# Allegro board LAY-96098_A.brd
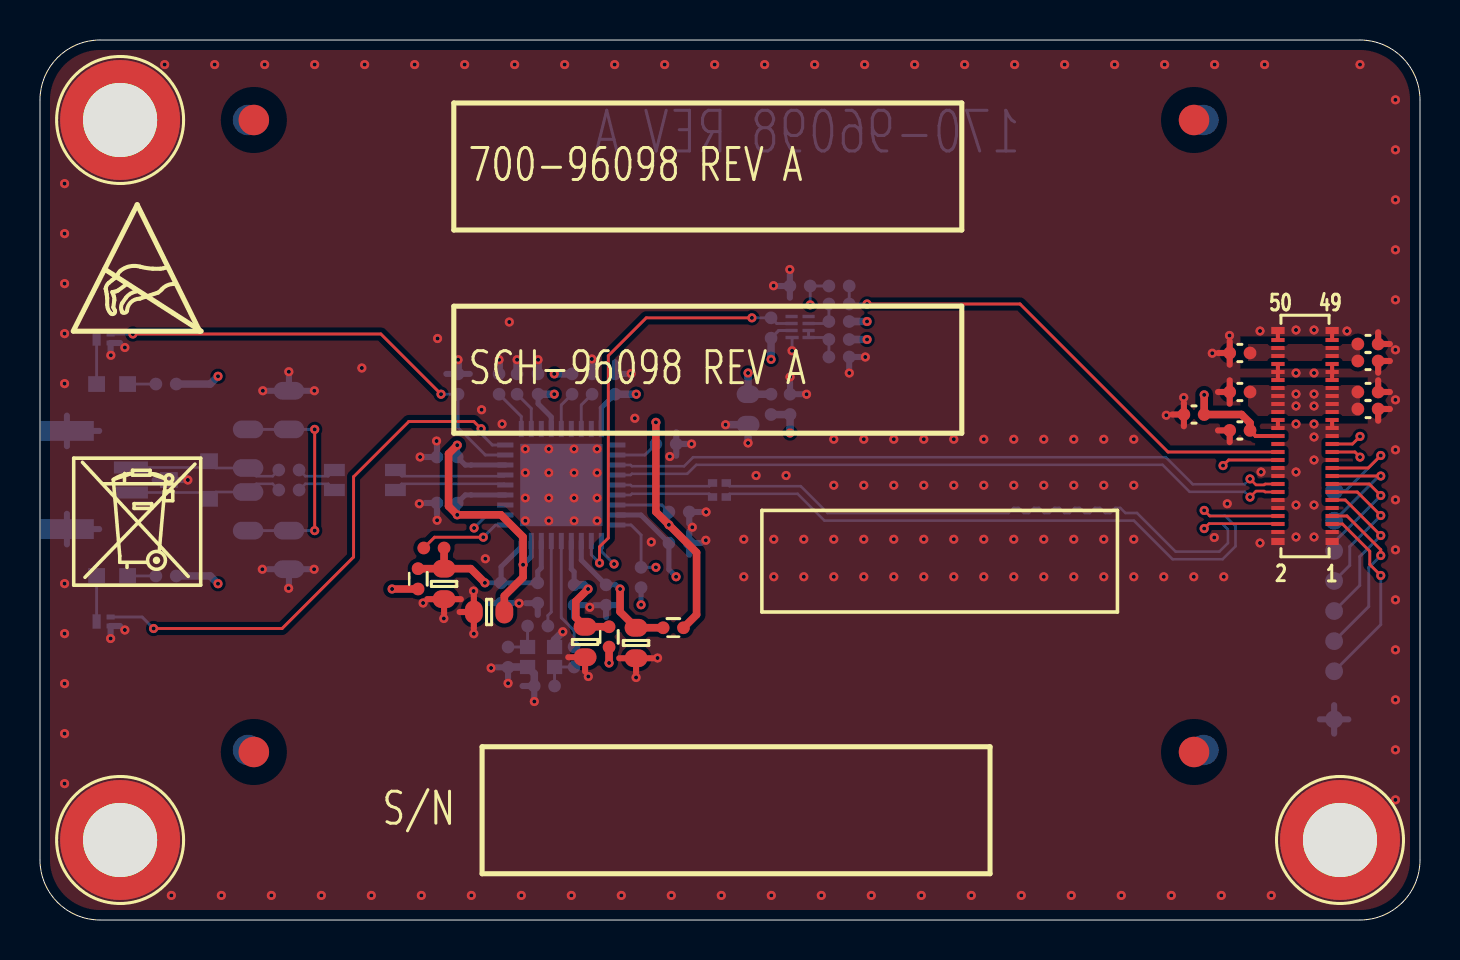
[diagram p0: board, top side]
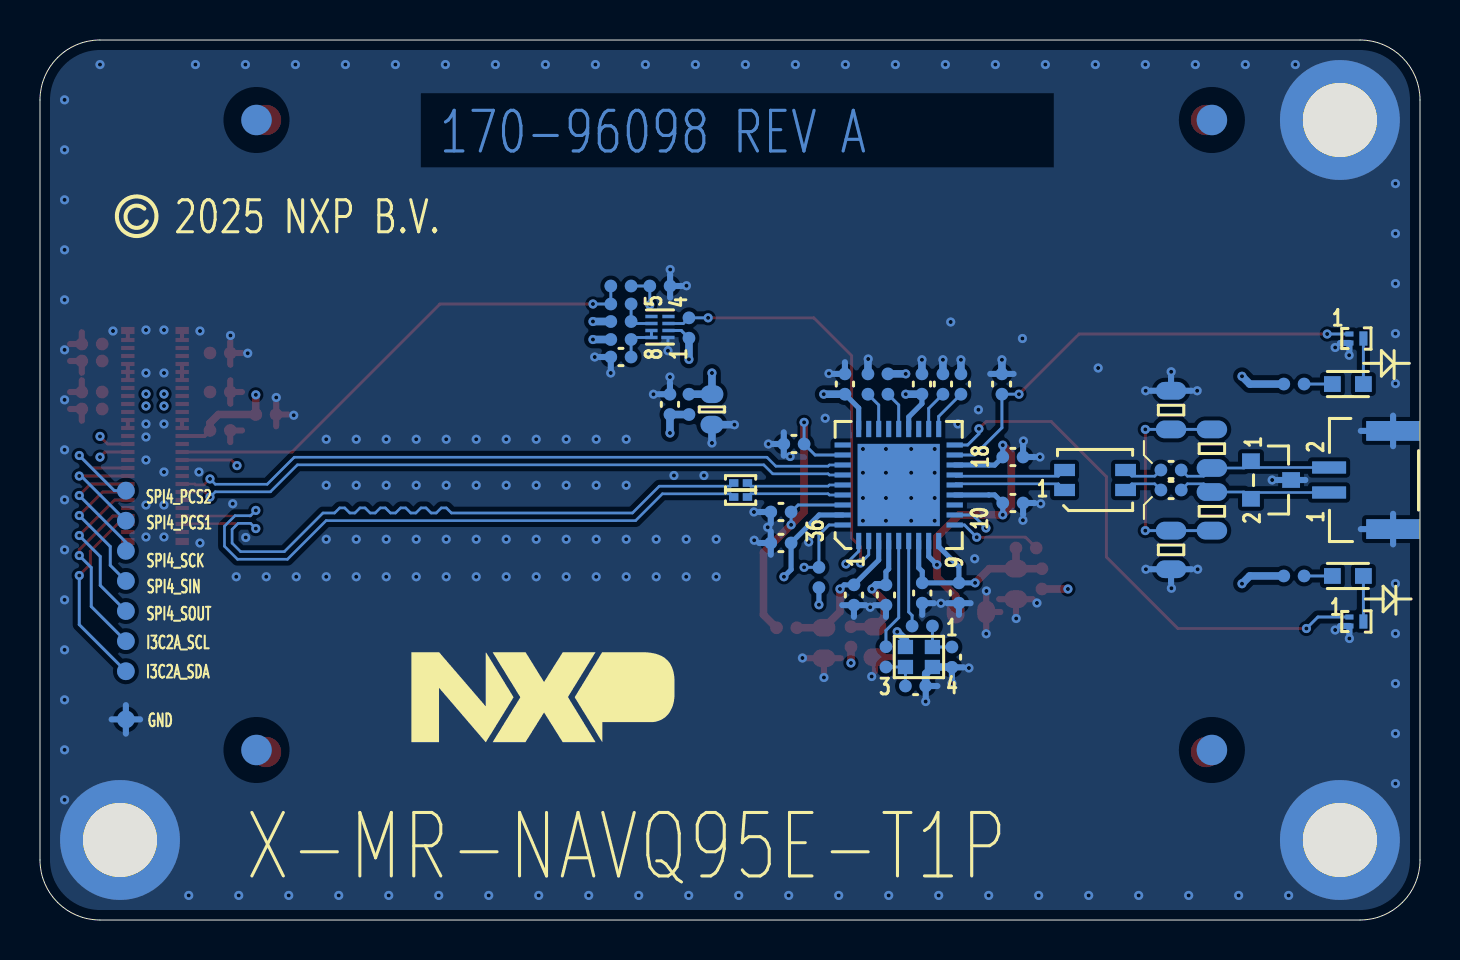
[diagram p1: board, bottom side, seen from below]

Outline 69.01 x 44 mm; copper layers: TOP, L2_GND1, L3_SIG1, L4_SIG2, L5_GND2, BOTTOM. Coordinates in mm from the lower left corner of the outline.
Outline path: 0,41 arc(0.88,43.12) 3,44 66.01,44 arc(68.13,43.12) 69.01,41 69.01,3 arc(68.13,0.88) 66.01,0 3,0 arc(0.88,0.88) 0,3 0,41

## Design rules (mm)
constraint set DEFAULT: min track width 0.145
net group DP1: nets TRX_M TRX_P
net group DP2: nets N13161 N13259
net group DP3: nets N13153 N13235
net group DP4: nets N44594 N44600
net group ETH_RX0: nets ETH_RX0_N ETH_RX0_P
net group ETH_TX4: nets ETH_TX0_N ETH_TX0_P

## Placement (name value [footprint] x y rotation side)
BH1  MH3.7_6  [MH236-146P]  4.01 40 0 top
BH2  MH3.7_6  [MH236-146P]  4.01 4 0 top
BH3  MH3.7_6  [MH236-146P]  65.01 4 0 top
C6  0.1uF  [CC0402_25]  39.96 28.15 0 bottom
C488  0.1uF  [CC0402_25]  24.89 16.35 270 bottom
C493  1uF  [CC0603_OV]  20.21 16.8 270 top
C499  0.1uF  [CC0201]  33.97 21.15 180 bottom
C500  0.1uF  [CC0201]  33.97 21.85 180 bottom
C501  0.1uF  [CC0402_25]  23.06 16.35 270 bottom
C502  0.1uF  [CC0402_25]  28.31 16.25 270 bottom
C503  10uF  [CC0603_OV]  29.81 13.85 270 top
C504  0.1uF  [CC0402_25]  26.71 16.25 270 bottom
C505  1uF  [CC0603_OV]  27.26 13.9 270 top
C506  0.1uF  [CC0402_25]  37.51 25.78 90 bottom
C507  0.1uF  [CC0402_25]  28.76 26.8 90 bottom
C508  1uF  [CC0603_OV]  35.41 25.53 270 bottom
C509  0.1uF  [CC0402_25]  24.91 26.8 90 bottom
C510  0.1uF  [CC0402_25]  31.96 18.85 0 bottom
C511  1uF  [CC0603_OV]  22.46 15.4 180 top
C512  0.1uF  [CC0402_25]  20.36 20.85 180 bottom
C513  0.1uF  [CC0402_25]  20.36 23.15 180 bottom
C514  0.1uF  [CC0402_25]  31.96 20.4 0 bottom
C515  0.1uF  [CC0402_25]  31.31 23.8 0 bottom
C516  10pF  [CC0402_25]  25.22 11.7 180 bottom
C517  10pF  [CC0402_25]  23.41 13.14 270 bottom
C518  0.1uF  [CC0402_25]  12.45 21.5 180 bottom
C519  0.1uF  [CC0402_25]  12.45 22.5 180 bottom
C520  4700pF  [CC0805_OV]  12.45 18.5 270 bottom
C521  1uF  [CC0402_25]  66.41 28.8 0 top
C522  1uF  [CC0402_25]  66.41 25.55 0 top
C523  0.1uF  [CC0402_25]  66.41 26.4 0 top
C524  0.1uF  [CC0402_25]  66.41 27.95 0 top
C525  0.1uF  [CC0402_25]  60 28.35 180 top
C526  0.1uF  [CC0402_25]  60 26.4 180 top
C527  1uF  [CC0402_25]  57.71 25.27 180 top
C528  0.1uF  [CC0402_25]  60 24.48 180 top
D33  LED_AMB  [LED_0603]  3.61 26.8 180 bottom
D34  LED_GRN  [LED_0603]  3.61 17.2 180 bottom
J27  SM02B-GHS-TB(LF)(SN)  [CON_1X2_1P25_5P8X4P1_SM_RA]  2.3 22 90 bottom
J33  CON PLUG 2X25  [CON50_0P4_11P72X2P05_SM_A]  63.26 24.2 90 top
L1  600OHM  [IND_0402]  18.91 17.06 270 top
L2  600OHM  [IND_0402]  28.46 14.15 270 top
L3  600OHM  [IND_0402]  36.56 25.78 90 bottom
L4  600OHM  [IND_0402]  31.67 14.61 0 top
L55  DLW32MH101XT2  [IND_3P4X2P7_SMT]  16.25 22 180 bottom
NOREF  -  [unnamed]  57.71 40 0 top
NOREF#2  -  [#2]  21.91 14 0 top
NOREF#3  -  [#2]  2.66 28.75 0 top
NOREF#4  -  [#2]  1.35 19.55 90 top
NOREF#5  -  [#2]  21.91 14 90 top
NOREF#6  -  [#2]  20.69 24.34 0 top
NOREF#7  -  [#2]  2.66 14.6 0 top
NOREF#8  -  [#2]  3.53 14.7 90 top
NOREF#9  -  [#2]  36.1 15.4 0 top
NOREF#10  -  [#2]  1.68 29.44 0 top
NOREF#11  -  [#2]  2.83 29.07 0 top
NOREF#12  -  [#2]  37.51 30.32 0 top
NOREF#13  -  [#2]  67.87 4.9 0 top
NOREF#14  -  [#2]  37.58 30.18 0 top
NOREF#15  -  [#2]  22.11 2.31 0 top
NOREF#16  -  [#2]  38.43 29.82 90 top
NOREF#17  -  [#2]  2.83 14.93 0 top
NOREF#18  -  [#2]  -441.94 233.39 0 top
NOREF#19  -  [#2]  38.51 28.98 90 top
NOREF#20  -  [#2]  25.73 12.65 90 top
NOREF#21  -  [#2]  6.02 0 90 top
NOREF#22  -  [unnamed]  10.69 8.4 0 top
NOREF#23  -  [#2]  3.53 28.85 90 top
NOREF#24  -  [#2]  0.25 24.9 0 top
NOREF#25  -  [#2]  62.23 30.06 0 top
NOREF#26  -  [#2]  61.9 19.4 90 top
NOREF#27  -  [#2]  -45.58 -91.35 0 top
NOREF#28  -  [#2]  14.72 21.5 90 top
NOREF#29  -  [#2]  14.72 21.5 0 top
NOREF#30  -  [#2]  64.28 18.34 90 top
NOREF#31  -  [unnamed]  57.71 8.4 0 top
NOREF#32  -  [#2]  0.25 24.9 0 top
NOREF#33  -  [#2]  17.45 20.45 0 top
NOREF#34  -  [#2]  20.69 34.5 0 top
NOREF#35  -  [#2]  -467.22 -286.29 0 top
NOREF#36  -  [#2]  1.68 16.74 0 top
NOREF#37  -  [unnamed]  10.69 40 0 top
NOREF#38  -  [#2]  53.88 15.4 0 top
NOREF#39  -  [#2]  6.87 40.9 0 top
NOREF#40  -  [#2]  0 39.6 0 top
NOREF#41  -  [#2]  3.71 28.75 90 top
NOREF#42  -  [#2]  3.71 14.6 90 top
NOREF#43  -  [#2]  61.9 29.48 0 top
NOREF#44  -  [#2]  19.7 23.85 0 top
NOREF#45  -  [#2]  4.01 4 0 top
NOREF#46  -  [#2]  37.61 29.12 0 top
NOREF#47  -  [#2]  6.87 4.9 0 top
NOREF#48  -  [#2]  24.38 13.65 0 top
NOREF#49  -  [unnamed]  10.41 40 180 bottom
NOREF#50  -  [unnamed]  58.18 8.5 180 bottom
NOREF#51  -  [unnamed]  58.18 40 180 bottom
NOREF#52  -  [unnamed]  10.41 8.5 180 bottom
NOREF#53  -  [#2]  64.17 35.16 180 bottom
NOREF#54  -  [#2]  50.42 8.89 180 bottom
Q4  NX5008NBKMYL  [DFN10106B]  3.18 14.93 180 bottom
Q6  NX5008NBKMYL  [DFN10106B]  3.18 29.07 180 bottom
R5  200K  [RC0402_25]  39.96 29.02 180 bottom
R41  10K  [RC0402_25]  38.01 31.7 180 bottom
R42  0 OHM  [RC0402_25]  39.96 30.8 180 bottom
R223  10K  [RC0402_25]  30.06 17.12 90 bottom
R224  10K  [RC0402_25]  19.7 18.6 180 top
R231  680  [RC0402_25]  6.3 26.8 180 bottom
R232  680  [RC0402_25]  6.3 17.2 180 bottom
R233  15  [RC0402_25]  26.71 13.16 270 bottom
R234  15  [RC0402_25]  24.89 14.7 180 bottom
R235  0 OHM  [RC0402_25]  39.96 31.7 180 bottom
R236  10K  [RC0402_25]  36.56 29.6 90 bottom
R237  10K  [RC0402_25]  20.91 26.8 90 bottom
R239  10K  [RC0402_25]  23.86 26.8 90 bottom
R240  10K  [RC0402_25]  22.96 26.8 90 bottom
R559  1.0K  [RC0805_OV]  10.41 20.43 270 bottom
R560  1.0K  [RC0805_OV]  10.41 23.57 90 bottom
R561  100 K  [RC0805_OV]  12.45 25.5 90 bottom
R562  10K  [RC0402_25]  27.61 26.8 90 bottom
R563  10K  [RC0402_25]  26.61 26.8 270 bottom
R564  10K  [RC0402_25]  39.96 29.93 180 bottom
TP1  TP_35MIL  [TESTPOINT_35MIL]  64.71 12.44 270 bottom
TP2  TP_35MIL  [TESTPOINT_35MIL]  64.71 13.94 270 bottom
TP3  TP_35MIL  [TESTPOINT_35MIL]  64.71 15.45 270 bottom
TP4  TP_35MIL  [TESTPOINT_35MIL]  64.71 16.95 270 bottom
TP5  TP_35MIL  [TESTPOINT_35MIL]  64.71 18.46 270 bottom
TP6  TP_35MIL  [TESTPOINT_35MIL]  64.71 19.96 270 bottom
TP7  TP_35MIL  [TESTPOINT_35MIL]  64.71 21.47 270 bottom
TP8  TP_35MIL  [TESTPOINT_35MIL]  64.71 10.03 0 bottom
U1  TJA1103BHN  [QFN36_0P5_6X6]  26.07 21.75 90 bottom
U64  PESD2ETH1G-T  [SOT23_A]  7.45 22 270 bottom
U65  PCA9306JK  [X2SON8_0P35_1X1P35MM]  38.01 29.65 0 bottom
Y1  25MHz  [XTL4_2P1X1P7MM_SM]  25.06 13.15 0 bottom

## Library data of the parts
BH1-BH3 = MOUNT_HOLE
C6 C493 C503 C505 C508 C511 C516-C522 C527 = CAP_NP
C488 C501 C502 C504 C506 C507 C509 C510 C512-C515 C523-C526 C528 = CAP_NP: tolerance: 10%
C499 C500 = CAP_NP: Tolerance: TOLERANCE; User Part Number: 150-80124
D33 D34 = LED
J27 = CONN_2X1_SH
J33 = HDR_2X25_4S
L1-L4 = INDUCTOR
L55 = DLW43
Q4 Q6 = NMOS_2N7002BKW_3P
R5 R41 R42 R223 R224 R231-R237 R239 R240 R562-R564 = RES
R559-R561 = RES: tolerance: 1%
TP1-TP8 = T POINT R: Tolerance: TOLERANCE; User Part Number: 510-75618
U1 = TJA1103BHN_HVQFN36P
U64 = ESD_DIODE_2LINE
U65 = PCA9306_TSSOP8
Y1 = XTAL_13

## Footprints (pads in the part's own frame, mm; a bottom-side part is the same pattern mirrored in y, then rotated)
CC0201
  rect 0.47x0.381 smd: 1(-0.343,0) 2(0.343,0)
CC0402_25
  round 0.635 smd: 1(-0.508,0) 2(0.508,0)
CC0603_OV
  oval 0.889x1.143 smd: 1(-0.762,0) 2(0.762,0)
CC0805_OV
  oval 0.889x1.524 smd: 1(-0.965,0) 2(0.965,0)
CON50_0P4_11P72X2P05_SM_A
  rect 0.203x0.66 smd: 1(-4.8,-1.355) 2(-4.8,1.355) 3(-4.4,-1.355) 4(-4.4,1.355) 5(-4,-1.355) 6(-4,1.355) 7(-3.6,-1.355) 8(-3.6,1.355) 9(-3.2,-1.355) 10(-3.2,1.355) 11(-2.8,-1.355) 12(-2.8,1.355) 13(-2.4,-1.355) 14(-2.4,1.355) 15(-2,-1.355) 16(-2,1.355) 17(-1.6,-1.355) 18(-1.6,1.355) 19(-1.2,-1.355) 20(-1.2,1.355) 21(-0.8,-1.355) 22(-0.8,1.355) 23(-0.4,-1.355) 24(-0.4,1.355) 25(0,-1.355) 26(0,1.355) 27(0.4,-1.355) 28(0.4,1.355) 29(0.8,-1.355) 30(0.8,1.355) 31(1.2,-1.355) 32(1.2,1.355) 33(1.6,-1.355) 34(1.6,1.355) 35(2,-1.355) 36(2,1.355) 37(2.4,-1.355) 38(2.4,1.355) 39(2.8,-1.355) 40(2.8,1.355) 41(3.2,-1.355) 42(3.2,1.355) 43(3.6,-1.355) 44(3.6,1.355) 45(4,-1.355) 46(4,1.355) 47(4.4,-1.355) 48(4.4,1.355) 49(4.8,-1.355) 50(4.8,1.355)
  rect 0.356x0.66 smd: SH1(-5.275,1.355) SH2(-5.275,-1.355) SH3(5.275,-1.355) SH4(5.275,1.355)
CON_1X2_1P25_5P8X4P1_SM_RA
  rect 0.61x1.702 smd: 1(-0.625,2.247) 2(0.625,2.247)
  rect 0.991x2.692 smd: S1(-2.455,-0.953) S2(2.455,-0.953)
DFN10106B
  rect 0.406x0.254 smd: 1(-0.35,0.225) 2(-0.35,-0.225)
  rect 0.406x0.711 smd: 3(0.35,0)
IND_3P4X2P7_SMT
  rect 1.041x0.61 smd: 1(-1.525,-0.5) 2(1.525,-0.5) 3(1.525,0.5) 4(-1.525,0.5)
IND_0402
  round 0.635 smd: 1(-0.508,0) 2(0.508,0)
LED_0603
  rect 0.838x0.787 smd: A(-0.775,0) C(0.775,0)
MH236-146P
  round 5.994 hole 3.708: 1(0,0)
QFN36_0P5_6X6
  rect 0.813x0.254 smd: 1(-2.8,2) 2(-2.8,1.5) 3(-2.8,1) 4(-2.8,0.5) 5(-2.8,0) 6(-2.8,-0.5) 7(-2.8,-1) 8(-2.8,-1.5) 9(-2.8,-2) 19(2.8,-2) 20(2.8,-1.5) 21(2.8,-1) 22(2.8,-0.5) 23(2.8,0) 24(2.8,0.5) 25(2.8,1) 26(2.8,1.5) 27(2.8,2)
  rect 0.254x0.813 smd: 10(-2,-2.8) 11(-1.5,-2.8) 12(-1,-2.8) 13(-0.5,-2.8) 14(0,-2.8) 15(0.5,-2.8) 16(1,-2.8) 17(1.5,-2.8) 18(2,-2.8) 28(2,2.8) 29(1.5,2.8) 30(1,2.8) 31(0.5,2.8) 32(0,2.8) 33(-0.5,2.8) 34(-1,2.8) 35(-1.5,2.8) 36(-2,2.8)
  rect 4.115x4.115 smd: 37(0,0)
RC0402_25
  round 0.635 smd: 1(-0.508,0) 2(0.508,0)
RC0805_OV
  oval 0.889x1.524 smd: 1(-0.965,0) 2(0.965,0)
SOT23_A
  rect 0.787x0.889 smd: 1(-0.94,-1.003) 2(0.94,-1.003) 3(0,1.003)
TESTPOINT_35MIL
  round 0.889 smd: 1(0,0)
unnamed
  round 1.524 smd: (0,0)
X2SON8_0P35_1X1P35MM
  rect 0.66x0.17 smd: 1(-0.4,0.525)
  rect 0.61x0.17 smd: 2(-0.425,0.175) 3(-0.425,-0.175) 4(-0.425,-0.525) 5(0.425,-0.525) 6(0.425,-0.175) 7(0.425,0.175) 8(0.425,0.525)
XTL4_2P1X1P7MM_SM
  rect 0.762x0.711 smd: 1(-0.675,-0.5) 2(0.675,-0.5) 3(0.675,0.5) 4(-0.675,0.5)

## Nets
GND: BH1.1 BH2.1 BH3.1 C6.2 C488.2 C493.2 C501.2 C502.2 C503.2 C504.2 C505.2 C506.2 C507.2 C508.2 C509.2 C510.2 C511.2 C512.2 C513.2 C514.2 C515.2 C516.2 C517.2 C520.2 C521.2 C522.2 C523.2 C524.2 C525.2 C526.2 C527.2 C528.2 J27.S1 J27.S2 J33.1 J33.2 J33.7 J33.8 J33.10 J33.16 J33.18 J33.19 J33.24 J33.25 J33.27 J33.28 J33.29 J33.30 J33.39 J33.40 J33.41 J33.42 J33.43 J33.44 J33.49 J33.50 J33.SH1 J33.SH2 J33.SH3 J33.SH4 Q4.2(SOURCE) Q6.2(SOURCE) R41.2 R237.2 R239.2 R240.2 R561.2 R562.2 TP8.1(TP) U1.37 U64.3(COM_CATHODE) U65.1 Y1.2 Y1.4
VDD_CORE: C502.1 C503.1 L4.1 U1.3
VDD_SYS_1V8: C506.1 C527.1 C528.1 J33.26 L3.1
VDD_SYS_3V3: C522.1 C523.1 C526.1 J33.31 J33.32 J33.33 J33.34 J33.35 J33.36 J33.37 J33.38 L1.2 L2.2 R5.1 R231.1 R232.1 R564.1
VDD_SYS_5V0: C521.1 C524.1 C525.1 J33.45 J33.46 J33.47 J33.48
VDDA_AO: C488.1 C493.1 C501.1 L1.1 R224.1 U1.7 U1.9
VDDIO: C507.1 C508.1 C509.1 C510.1 L3.2 R223.1 R236.1 R563.1 U1.22 U1.27 U1.35 U65.2
ENET_MDC: J33.23 U1.1
ENET_MDIO: J33.21 R223.2 U1.36
ETH_RST: J33.20 R224.2 U1.10
ETH_RX0_N: J33.14 U1.30
ETH_RX0_P: J33.12 U1.31
ETH_TX0_N: C499.1 J33.6
ETH_TX0_P: C500.1 J33.4
ETH_WAKE_INT: J33.22 R42.1 R235.1
GPIO0_CONFIG0_LED: Q6.1 R237.1 U1.17
GPIO1_LED: Q4.1 U1.18
I3C2A_SCL: J33.5 TP2.1(TP)
I3C2A_SDA: J33.3 TP1.1(TP)
SPI4_PCS1: J33.15 TP6.1(TP)
SPI4_PCS2: J33.17 TP7.1(TP)
SPI4_SCK: J33.13 TP5.1(TP)
SPI4_SIN: J33.11 TP4.1(TP)
SPI4_SOUT: J33.9 TP3.1(TP)
TJA_INT_N: R236.2 U1.2(\I\N\T\) U65.3
TJA_WAKE_IN_OUT: R41.1 R235.2 U1.11
TRX_M: L55.4 U1.15
TRX_P: L55.1 U1.14
VREGA_OUT: C511.1 C512.1 C513.1 U1.8 U1.13 U1.16
N03569: C504.1 C505.1 L2.1 U1.4
N06696: C514.1 C515.1 L4.2 U1.29 U1.34
N08528: C516.1 R233.2 Y1.3
N08532: R233.1 U1.5
N08540: R234.1 U1.6
N08546: C517.1 R234.2 Y1.1
N12404: R240.1 U1.19
N12408: R239.1 U1.20
N13153: C518.2 J27.1 R559.1 U64.2
N13161: C518.1 L55.2
N13235: C519.2 J27.2 R560.1 U64.1
N13259: C519.1 L55.3
N13323: C520.1 R559.2 R560.2 R561.1
N16366: R562.1 U1.25
N16892: R563.2 U1.23
N19109: C6.1 R5.2 U65.7(VREF2) U65.8
N22838: R42.2 R564.2 U65.6
N37884: D34.C(CATHODE) Q4.3
N37999: D34.A R232.2
N38628: D33.C(CATHODE) Q6.3
N38904: D33.A R231.2
N44594: C499.2 U1.33
N44600: C500.2 U1.32

Pads without a net: U1 12 21 24 26 28; U65 4 5

## Via types
v1: diameter 0.457, hole 0.203, TOP to BOTTOM, 261 vias
v2: diameter 0.457, hole 0.206, TOP to BOTTOM, 16 vias

## Routing (per net, layer and track width the routed paths; a pad name or vN(x,y) marks a point on that pad's centre or on a via; arc(x,y) is an arc through that point)
GND: length 71.9
  TOP w0.203: J33.49 J33.SH3 ; J33.44 J33.42 J33.40 ; J33.50 J33.SH4 ; J33.29 J33.27 ; J33.43 J33.41 J33.39 ; J33.30 J33.28
  TOP w0.305: 29.81,12.38 C503.2 ; C503.2 30.64,13.09 ; C503.2 28.97,13.09 ; C493.2 21.04,16.04 ; C493.2 19.37,16.04 ; C493.2 20.21,15.33 ; C526.2 59.49,26.98 ; C526.2 59.49,25.82 ; C526.2 58.91,26.4 ; C527.2 57.2,25.86 ; C527.2 57.2,24.69 ; C527.2 56.61,25.27 ; 66.91,26.98 C523.2 67.5,26.4 ; 26.42,13.14 C505.2 27.26,12.43 ; 67.5,27.95 C524.2 66.91,27.37 ; 58.91,24.48 C528.2 59.49,23.89 ; 59.49,27.77 C525.2 ; C525.2 59.49,28.93 ; C525.2 58.91,28.35 ; 20.98,15.4 C511.2 ; C511.2 21.69,16.24 ; C511.2 21.69,14.56 ; 67.5,25.55 C522.2 66.91,24.97 ; 66.91,29.38 C521.2 67.5,28.8
  BOTTOM w0.145: U65.1 v1(37.61,28.46)
  BOTTOM w0.305: 24.71,11.12 C516.2 24.13,11.7 ; 41.05,28.15 C6.2 40.46,27.57 ; 27.72,15.74 C502.2 ; C502.2 28.31,15.16 ; C502.2 28.89,15.74 ; C520.2 13.48,17.54 ; C520.2 12.45,16.83 ; C520.2 11.42,17.54 ; 26.71,15.16 C504.2 27.29,15.74 ; J27.S2 1.35,25.22 ; J27.S2 2.96,24.45 ; J27.S2 1.35,23.69 ; J27.S1 1.35,20.31 ; J27.S1 1.35,18.78 ; J27.S1 2.96,19.55 ; 37.51,26.87 C506.2 38.09,26.29 ; R561.2 12.45,27.17 ; R561.2 13.48,26.46 ; R561.2 11.42,26.46 ; C515.2 32.4,23.8 ; C515.2 31.81,24.38 ; C515.2 31.81,23.22 ; C510.2 33.05,18.85 ; C510.2 32.46,19.43 ; C510.2 32.46,18.27 ; R41.2 37.5,32.28 ; R41.2 36.91,31.7 ; R41.2 37.5,31.12 ; 5.73,22 U64.3 7.16,22 ; C501.2 23.64,15.84 ; C501.2 22.47,15.84 ; C501.2 23.06,15.26 ; 19.26,23.15 C513.2 19.85,23.73 ; 4,28.85 Q6.2 3.53,28.46 ; 33.05,20.4 C514.2 32.46,19.82 ; 20.32,27.31 R237.2 21.49,27.31 ; 3.53,14.31 Q4.2 4,14.7 ; 22.82,12.63 C517.2 23.41,12.05 ; 19.26,20.85 C512.2 19.85,20.27 ; 28.76,27.89 C507.2 29.34,27.31 ; 24.3,15.84 C488.2 24.89,15.26 ; 64,10.03 TP8.1 ; TP8.1 64.71,10.74 ; TP8.1 64.71,9.32 ; TP8.1 65.42,10.03
  BOTTOM w0.381: R237.2 v1(20.91,28.01) ; R239.2 v1(23.86,28.01) ; v1(27.59,28.05) 27.61,28.04 R562.2 ; C516.2 24.71,12.32 Y1.4 23.42,12.65 C517.2 ; C509.2 v1(24.91,28.01) ; v1(34.28,24.76) 34.28,24.77 C508.2 v1(35.41,23.85) ; v1(26.14,14.41) 25.73,14 Y1.2 ; R240.2 v1(22.96,28.01)
  vias: v1(1.23,36.82) v1(1.23,34.32) v1(1.23,31.82) v1(1.23,29.32) v1(1.23,26.82) v1(1.23,16.82) v1(1.23,14.32) v1(1.23,11.82) v1(1.23,9.32) v1(1.23,6.82) v1(3.54,28.24) v1(3.53,14.07) v1(4.24,28.62) v1(4.24,14.5) v1(6.23,42.77) v1(6.57,1.23) v1(7.39,22) v1(8.73,42.77) v1(9.07,1.23) v1(11.14,26.46) v1(11.12,17.54) v1(11.23,42.77) v1(11.57,1.23) v1(12.44,27.41) v1(12.43,16.59) v1(13.73,42.77) v1(13.72,26.46) v1(13.71,17.54) v1(14.07,1.23) v1(16.09,27.6) v1(16.23,42.77) v1(16.57,1.23) v1(18.73,42.77) v1(19.01,23.15) v1(18.97,20.81) v1(19.07,1.23) v1(19.16,15.85) v1(19.83,23.95) v1(19.86,19.99) v1(19.88,29.07) v1(20.19,15.07) v1(21.23,42.77) v1(21.57,1.23) v1(21.68,16.45) v1(21.69,14.31) v1(22.08,25.51) v1(22.27,18.06) v1(22.56,12.6) v1(23.11,24.8) v1(23.41,11.84) v1(23.47,29.9) v1(23.73,42.77) v1(23.96,15.84) v1(24.07,1.23) v1(24.72,10.93) v1(26.23,42.77) v1(26.57,1.23) v1(27.42,12.18) v1(27.49,15.64) v1(28.73,42.77) v1(29.07,1.23) v1(29.56,27.32) v1(29.74,25.09) v1(29.81,12.12) v1(30.57,18.9) v1(30.88,13.1) v1(31.23,42.77) v1(31.49,23.18) v1(31.57,1.23) v1(32.58,23.8) v1(32.62,19.64) v1(33.31,20.4) v1(33.29,18.99) v1(33.73,42.77) v1(34.07,1.23) v1(35.19,19.04) v1(35.19,17.16) v1(35.81,22.23) v1(36.23,42.77) v1(36.57,1.23) v1(36.68,31.71) v1(36.69,19.04) v1(36.69,17.16) v1(37.31,22.23) v1(37.49,32.52) v1(37.51,27.15) v1(38.19,19.04) v1(38.19,17.16) v1(38.33,26.29) v1(38.73,42.77) v1(39.07,1.23) v1(39.69,24.04) v1(39.69,21.74) v1(39.69,19.04) v1(39.69,17.16) v1(40.47,27.35) v1(41.23,42.77) v1(41.19,24.04) v1(41.19,21.74) v1(41.19,19.04) v1(41.19,17.16) v1(41.27,28.15) v1(41.57,1.23) v1(42.69,24.04) v1(42.69,21.74) v1(42.69,19.04) v1(42.69,17.16) v1(43.73,42.77) v1(44.07,1.23) v1(44.19,24.04) v1(44.19,21.74) v1(44.19,19.04) v1(44.19,17.16) v1(45.69,24.04) v1(45.69,21.74) v1(45.69,19.04) v1(45.69,17.16) v1(46.23,42.77) v1(46.57,1.23) v1(47.19,24.04) v1(47.19,21.74) v1(47.19,19.04) v1(47.19,17.16) v1(48.73,42.77) v1(48.69,24.04) v1(48.69,21.74) v1(48.69,19.04) v1(48.69,17.16) v1(49.07,1.23) v1(50.19,24.04) v1(50.19,21.74) v1(50.19,19.04) v1(50.19,17.16) v1(51.23,42.77) v1(51.57,1.23) v1(51.69,24.04) v1(51.69,21.74) v1(51.69,19.04) v1(51.69,17.16) v1(53.19,24.04) v1(53.19,21.74) v1(53.19,19.04) v1(53.19,17.16) v1(53.73,42.77) v1(54.07,1.23) v1(54.69,24.04) v1(54.69,21.74) v1(54.69,19.04) v1(54.69,17.16) v1(56.23,42.77) v1(56.19,17.16) v1(56.32,25.24) v1(56.57,1.23) v1(57.19,26.12) v1(57.69,17.16) v1(58.62,28.34) v1(58.73,42.77) v1(58.72,19.12) v1(59.07,1.23) v1(59.19,17.16) v1(59.37,20.81) v1(59.48,29.23) v1(61.01,29.45) v1(61.06,22.4) v1(61.01,18.85) v1(61.23,42.77) v1(61.57,1.23) v1(62.81,29.5) v1(62.81,27.35) v1(62.81,24.8) v1(62.81,22.4) v1(62.81,20.75) v1(62.81,19.15) v1(63.71,29.5) v1(63.71,27.35) v1(63.71,24.8) v1(63.71,24.15) v1(63.71,23) v1(63.71,20.75) v1(63.71,19.15) v1(65.36,29.45) v1(66.01,42.77) v1(67.78,41.01) v1(67.78,38.51) v1(67.78,36.01) v1(67.78,33.51) v1(67.78,31.01) v1(67.78,28.51) v1(67.78,26.01) v1(67.78,23.51) v1(67.78,21.01) v1(67.78,18.51) v1(67.78,16.01) v1(67.78,13.51) v1(67.78,11.01) v1(67.78,8.51) v1(67.78,6.01) v2(24.27,23.55) v2(24.27,22.36) v2(24.27,21.1) v2(24.27,19.96) v2(25.44,23.55) v2(25.44,22.36) v2(25.44,21.1) v2(25.44,19.96) v2(26.71,23.55) v2(26.71,22.36) v2(26.71,21.1) v2(26.71,19.96) v2(27.86,23.55) v2(27.86,22.36) v2(27.86,21.1) v2(27.86,19.96)
VDD_CORE: length 7.1
  TOP w0.381: v1(29.01,16.55) 29.01,15.41 C503.1 L4.1
  BOTTOM w0.254: v1(29.01,16.55) 28.8,16.76 C502.1 27.07,18 U1.3
VDD_SYS_1V8: length 7.2
  TOP w0.203: C528.1 60.79,24.2 J33.26
  TOP w0.381: C528.1 60.51,24.85 60.08,25.27 C527.1 v1(58.21,26.26)
  BOTTOM w0.381: v1(37.51,24.35) C506.1 L3.1
VDD_SYS_3V3: length 8.4
  TOP w0.381: L2.2 v1(28.46,12.85) ; L1.2 v1(17.61,16.55)
  BOTTOM w0.381: R231.1 8.51,26.8 v1(8.9,27.19) ; R232.1 8.51,17.2 v1(8.9,16.81) ; R564.1 v1(41.36,29.93) ; R5.1 v1(41.36,29.02)
  vias: v1(62.81,26.3) v1(62.81,25.7) v1(63.71,26.3) v1(63.71,25.7)
VDDA_AO: length 12
  TOP w0.381: R224.1 C493.1 ; C493.1 L1.1 ; C493.1 21.54,17.57 v1(22.25,16.86)
  BOTTOM w0.254: v1(22.25,16.86) C501.1 ; C501.1 C488.1 24.89,17.43 25.07,17.61 U1.7 ; C501.1 23.06,17.66 24.07,18.67 U1.9
VDDIO: length 17.1
  BOTTOM w0.152: R236.1 36.94,29.48 37.58,29.48
  BOTTOM w0.254: C507.1 28.07,25.6 U1.27 ; C509.1 24.91,25.81 25.57,25.15 U1.22 ; R223.1 v1(30.06,15.76) ; v1(31.81,17.16) 31.45,17.52 C510.1 30.05,20.25 U1.35
  BOTTOM w0.381: C509.1 v1(25.72,26.29) ; L3.2 C508.1 v1(35.41,27.35) ; R563.1 v1(25.72,27.31) ; C507.1 v1(29.82,26.29) ; R236.1 v1(36.56,28.03)
ENET_MDC: length 44.7
  TOP w0.145: v1(66.01,24.18) 65.63,23.8 J33.23
  L4_SIG2 w0.135: v1(66.01,24.18) 65.65,24.18 63.26,21.79 63.26,18.75 62.74,18.24 29.14,18.24 v1(28.71,17.8)
  BOTTOM w0.145: U1.1 28.07,18.44 v1(28.71,17.8)
ENET_MDIO: length 47.1
  TOP w0.145: J33.21 65.75,23.4 v1(66.01,23.15)
  L4_SIG2 w0.135: v1(66.01,23.15) 66.01,18.27 63.99,16.26 31.54,16.26 30.8,17.01 v1(30.8,17.63)
  BOTTOM w0.145: U1.36 29.56,19.75 30.06,19.25 R223.2 v1(30.8,17.63)
ETH_RST: length 45.9
  TOP w0.145: v1(59.16,22.72) 59.44,23 J33.20 ; v1(22.17,19.14) 19.73,19.14 R224.2
  L4_SIG2 w0.135: v1(59.16,22.72) 31.93,22.72 28.34,19.14 v1(22.17,19.14)
  BOTTOM w0.145: v1(22.17,19.14) 22.78,19.75 U1.10
ETH_RX0_N: length 34.1
  TOP w0.13: v1(60.51,22.05) 60.8,21.76 61.21,21.76 61.26,21.8 J33.14
  BOTTOM w0.13: U1.30 29.54,22.75 29.6,22.69 32.21,22.69 32.66,23.14 56.29,23.14 57.64,21.79 60.24,21.79 v1(60.51,22.05)
ETH_RX0_P: length 34.1
  TOP w0.13: v1(60.51,21.15) 60.8,21.44 61.22,21.44 61.26,21.4 J33.12
  BOTTOM w0.13: v1(60.51,21.15) 60.24,21.41 57.48,21.41 56.14,22.76 32.81,22.76 32.37,22.31 29.6,22.31 29.54,22.25 U1.31
ETH_TX0_N: length 33.9
  TOP w0.13: v1(58.21,20.48) 58.49,20.2 J33.6
  BOTTOM w0.13: C499.1 34.48,21.31 37.88,21.31 39.22,19.97 54.7,19.97 56.63,18.04 59.13,18.04 59.78,18.69 59.78,19.69 59.25,20.22 58.48,20.22 v1(58.21,20.48)
ETH_TX0_P: length 33.9
  TOP w0.13: v1(58.21,19.57) 58.46,19.82 61.88,19.82 J33.4
  BOTTOM w0.13: v1(58.21,19.57) 58.48,19.84 59.1,19.84 59.4,19.53 59.4,18.84 58.97,18.42 56.79,18.42 54.86,20.35 54.27,20.35 54.02,20.6 53.77,20.6 53.51,20.35 53.26,20.35 53,20.6 52.75,20.6 52.5,20.35 52.24,20.35 51.99,20.6 51.73,20.6 51.48,20.35 51.23,20.35 50.97,20.6 50.72,20.6 50.46,20.35 50.21,20.35 49.96,20.6 49.7,20.6 49.45,20.35 49.19,20.35 48.94,20.6 48.69,20.6 48.43,20.35 39.38,20.35 38.04,21.69 34.48,21.69 C500.1
ETH_WAKE_INT: length 25.4
  TOP w0.145: v1(41.36,30.8) 49.01,30.8 56.41,23.4 J33.22
  BOTTOM w0.145: R235.1 R42.1 v1(41.36,30.8)
GPIO0_CONFIG0_LED: length 23.2
  TOP w0.145: v1(20.05,26.29) 17.04,29.3 v1(4.64,29.3)
  BOTTOM w0.145: U1.17 22.27,23.25 20.91,24.61 R237.1 v1(20.05,26.29) ; Q6.1 v1(4.64,29.3)
GPIO1_LED: length 27.2
  TOP w0.145: v1(22.06,24.56) 21.69,24.93 18.44,24.93 15.68,22.16 15.68,18.15 12.11,14.57 v1(5.68,14.57)
  BOTTOM w0.145: v1(22.06,24.56) 22.06,24.31 22.62,23.75 U1.18 ; v1(5.68,14.57) 5.11,15.15 Q4.1
I3C2A_SCL: length 8.7
  TOP w0.145: J33.5 65.36,20.2 67.04,18.51 v1(67.04,18.23)
  BOTTOM w0.145: TP2.1 66.44,15.67 66.44,17.62 v1(67.04,18.23)
I3C2A_SDA: length 9.6
  TOP w0.145: v1(67.04,17.23) 66.49,17.77 66.49,18.44 65.13,19.8 J33.3
  BOTTOM w0.145: v1(67.04,17.23) 67.04,14.77 TP1.1
SPI4_PCS1: length 5.7
  TOP w0.145: v1(67.04,22.2) J33.15
  BOTTOM w0.145: v1(67.04,22.2) 66.95,22.2 TP6.1
SPI4_PCS2: length 5.8
  TOP w0.145: J33.17 66.42,22.6 v1(67.04,23.23)
  BOTTOM w0.145: v1(67.04,23.23) 65.29,21.47 TP7.1
SPI4_SCK: length 6.4
  TOP w0.145: v1(67.04,21.23) 66.47,21.8 J33.13
  BOTTOM w0.145: v1(67.04,21.23) 64.71,18.89 TP5.1
SPI4_SIN: length 7.2
  TOP w0.145: v1(67.04,20.23) 65.87,21.4 J33.11
  BOTTOM w0.145: TP4.1 65.49,17.73 65.49,18.68 v1(67.04,20.23)
SPI4_SOUT: length 7.9
  TOP w0.145: J33.9 65.27,21 v1(67.04,19.23)
  BOTTOM w0.145: TP3.1 65.99,16.73 65.99,18.18 v1(67.04,19.23)
TJA_INT_N: length 21.9
  TOP w0.145: v1(35.6,30.11) 30.31,30.11 28.42,28.21 28.42,19.1 27.98,18.66 v1(27.98,17.85)
  BOTTOM w0.145: v1(27.98,17.85) 27.57,18.26 U1.2 ; v1(35.6,30.11) R236.2 36.84,29.82 U65.3
TJA_WAKE_IN_OUT: length 26.6
  L4_SIG2 w0.135: v1(38.51,30.76) 31.5,30.76 25.09,24.35 23.96,24.35 21.71,22.1 v1(21.71,19.6)
  BOTTOM w0.145: v1(38.51,30.76) R41.1 R235.2 ; U1.11 22.36,20.25 v1(21.71,19.6)
TRX_M: length 5.6
  BOTTOM w0.13: L55.4 18.08,22.19 23.21,22.19 U1.15
TRX_P: length 5.6
  BOTTOM w0.13: L55.1 18.08,21.81 23.21,21.81 U1.14
VREGA_OUT: length 19.4
  TOP w0.381: C511.1 23.22,16.2 24.16,17.14 v1(24.16,17.76) 24.16,19.15 23.05,20.26 v1(20.86,20.26) 20.43,20.69 20.43,23.31 v1(20.86,23.74)
  BOTTOM w0.254: U1.8 24.57,18.17 v1(24.16,17.76) ; U1.16 21.56,22.75 21.56,22.75 21.27,22.75 C513.1 v1(20.86,23.74) ; U1.13 21.56,21.25 21.56,21.25 21.27,21.25 C512.1 v1(20.86,20.26)
N03569: length 6.6
  TOP w0.381: L2.1 C505.1 26.79,15.12 26.79,15.94 v1(27.41,16.55)
  BOTTOM w0.254: C504.1 26.71,17.41 26.57,17.55 U1.4
  BOTTOM w0.381: v1(27.41,16.55) 27.2,16.76 C504.1
N06696: length 18
  TOP w0.381: L4.2 32.83,15.27 32.83,18.38 v1(31.45,19.76) 30.8,20.41 v1(30.8,24.88)
  BOTTOM w0.145: U1.34 31.1,20.75 C514.1 v1(31.45,19.76) ; U1.29 30.25,23.25 C515.1 v1(30.8,24.88)
N08528: length 1.9
  BOTTOM w0.145: C516.1 Y1.3 R233.2
N08532: length 5.5
  BOTTOM w0.145: R233.1 26.71,14.47 26.07,15.11 U1.5
N08540: length 4.3
  BOTTOM w0.145: R234.1 25.4,15.23 25.57,15.4 U1.6
N08546: length 2
  BOTTOM w0.145: C517.1 Y1.1 R234.2
N12404: length 2.2
  BOTTOM w0.145: R240.1 24.07,25.18 U1.19
N12408: length 2
  BOTTOM w0.145: R239.1 24.57,25.58 U1.20
N13153: length 8
  BOTTOM w0.13: C518.2 11.63,21.81 10.82,21.81 R559.1 8.79,21.4 U64.2 8.14,21.38 J27.1
N13161: length 2
  BOTTOM w0.13: L55.2 14.41,21.81 13.27,21.81 C518.1
N13235: length 8
  BOTTOM w0.13: J27.2 8.14,22.62 U64.1 8.79,22.6 R560.1 10.82,22.19 11.63,22.19 C519.2
N13259: length 2
  BOTTOM w0.13: L55.3 14.41,22.19 13.27,22.19 C519.1
N13323: length 11.7
  TOP w0.145: v1(13.74,24.53) v1(13.74,19.47)
  BOTTOM w0.145: v1(13.74,24.53) R561.1 R560.2 ; R559.2 C520.1 v1(13.74,19.47)
N16366: length 2
  BOTTOM w0.145: R562.1 27.07,25.75 U1.25
N16892: length 2
  BOTTOM w0.145: U1.23 26.07,25.75 R563.2
N19109: length 2.3
  BOTTOM w0.145: 38.43,29.48 U65.8 39.35,29.12 R5.2 C6.1
N22838: length 1.9
  BOTTOM w0.145: R42.2 R564.2 39.35,29.82 U65.6
N37884: length 2.3
  BOTTOM w0.145: D34.C 2.83,14.93
N37999: length 1.4
  BOTTOM w0.145: D34.A R232.2
N38628: length 2.3
  BOTTOM w0.145: D33.C 2.83,29.07
N38904: length 1.4
  BOTTOM w0.145: D33.A R231.2
N44594: length 4.9
  BOTTOM w0.13: U1.33 29.54,21.25 29.6,21.31 33.47,21.31 C499.2
N44600: length 4.9
  BOTTOM w0.13: C500.2 33.47,21.69 29.59,21.69 29.54,21.75 U1.32

## Copper pours and planes (outline as drawn; the poured copper is in the pictures)
GND on TOP, L2_GND1, L3_SIG1, L4_SIG2, L5_GND2: 0.5,41 1.23,42.77 3,43.5 66.01,43.5 67.77,42.77 68.51,41 68.51,3 67.77,1.23 66.01,0.5 3,0.5 1.23,1.23 0.5,3
GND on BOTTOM: 0.5,41 1.23,42.77 3,43.5 66.01,43.5 67.77,42.77 68.51,41 68.51,3 67.77,1.23 66.01,0.5 3,0.5 1.23,1.23 0.5,3 ; 2 cut-outs
VDD_SYS_1V8 on L3_SIG1: 52.81,25.4 36.26,25.4 36.06,25.2 36.06,23.9 36.21,23.75 60.56,23.75 61.01,24.2 61.01,25 59.16,26.85 54.26,26.85
VDD_SYS_3V3 on TOP: 60.41,26.75 60.41,25.7 60.91,25.2 66.01,25.2 66.01,26.75
VDD_SYS_3V3 on L4_SIG2: 23.46,14.6 28.91,14.6 29.76,13.75 29.76,12.4 28.91,11.55 10.58,11.55 6.73,15.4 6.73,31.82 10.36,35.45 42.61,35.45 48.66,29.4 64.56,29.4 65.16,28.8 65.16,25.75 64.56,25.15 43.06,25.15 39.66,28.55 39.66,31.45 38.66,32.45 28.31,32.45 20.01,24.15 20.01,18.05
VDD_SYS_5V0 on TOP: 60.41,28.8 60.41,27.95 66.01,27.95 66.01,28.8
VDDIO on L3_SIG1: 28.08,15.18 31.54,15.18 32.61,16.24 32.61,24.8 34.16,26.35 36.81,26.35 37.31,26.85 37.31,29.05 36.61,29.75 25.41,29.75 24.76,29.1 24.76,18.5

## Text on the board
BOTTOM: 09 | L6_SS | 170-96098 REV A
Board Geometry/Soldermask Bottom: 11 | SECONDARY SOLDERMASK
Ref Des/Silkscreen Bottom: GND | SPI4_SIN | SPI4_SCK | SPI4_PCS1 | SPI4_SOUT | I3C2A_SCL | SPI4_PCS2 | I3C2A_SDA | 10 | SECONDARY SILKSCREEN | X-MR-NAVQ95E-T1P
User.Comments: 1 OF 1 | TEST PROBE | 1/1 | 1 | 2
TOP: 04 | L1_PS
Board Geometry/Soldermask Top: 02 | PRIMARY SOLDERMASK
Ref Des/Silkscreen Top: 03 | PRIMARY SILKSCREEN
L2_GND1: 05 | L2_GND1
L3_SIG1: 06 | L3_SIG1
L4_SIG2: 07 | L4_SIG2
L5_GND2: 08 | L5_GND2
XSECTION_CHART: *  SURFACE - AIR 0 MM | *  DIELECTRIC - SOLDERMASK 0.02 MM | L1 TOP CONDUCTOR - COPPER 0.04 MM | *  DIELECTRIC - ISOLA PCL370HR 0.088 MM | L2 L2_GND1 PLANE - COPPER 0.016 MM | *  DIELECTRIC - ISOLA PCL370HR 0.1 MM | L3 L3_SIG1 CONDUCTOR - COPPER 0.016 MM | *  DIELECTRIC - ISOLA PCL370HR 0.996 MM | L4 L4_SIG2 CONDUCTOR - COPPER 0.016 MM | L5 L5_GND2 PLANE - COPPER 0.016 MM | L6 BOTTOM CONDUCTOR - COPPER 0.04 MM | DESIGN CROSS SECTION CHART | ___________________________ | TOTAL THICKNESS 1.556 MM | 1-6
DIMENSION: LAYERS | L1_PS | L3_SIG1 | L4_SIG2 | L6_SS | TRACE WIDTH | 0.145 | N/A | 0.135 | SE | IMPEDANCE | 50.00 | 0.130 | TRACE SPACING | 0.25 | DIFF | 100.00 | REFERENCE LAYER | 2 | 5 | SCALE: NONE | BOARD THICKNESS TOLERANCE +/-10% | 21. THE MANUFACTURE HAS THE OPTION TO ADD COPPER THIEVING ON OUTER AND INNER LAYERS, | 22. THIS BOARD USES VIA-IN-PAD: SEE FAB_VIAFILL.ART | 1. THIS DRAWING SPECIFIES THE REQUIREMENTS FOR A PRINTED WIRING BOARD IN ACCORDANCE. | WITH SPECIFICATION IPC-6012 CLASS 2 (LATEST REVISION). | 2. THE PWB MUST BE LEAD FREE ASSEMBLY PROCESS COMPATIBLE AND MUST BE ABLE TO HANDLE | A MINIMUM OF 5 CYCLES AT 260 DEGREES CELSIUS FOR 10 SECONDS. | 3. BASE MATERIAL - LAMINATE AND PREPREG SHALL MEET IPC-4101B-26, 83 or 98 | 4. COPPER FOIL WEIGHT - SEE STACKUP DETAIL 'A' | 5. CHARACTERISTIC IMPEDANCE - SEE DETAIL 'B' | 6. MINIMUM CONDUCTIVE WIDTH/SPACING TO BE 0.13mm/0.127mm | 7. PLATING FINISH -A. BOTH SIDES ENIG TO MEET THE REQUIREMENTS OF IPC-4552 (LATEST REVISION). | 10. SILKSCREEN - WHITE EPOXY OR ACRYLIC INK, BOTH SIDES. NO SILKSCREEN ON ANY EXPOSED COPPER FEATURE. | 12. PRINTED WIRING BOARD IS TO BE INDIVIDUALLY BAGGED. | 13. DFM CHECK MUST BE RUN ON BOARD DATA BEFORE BUILDING BOARDS, | UNLESS PRIOR APPROVAL IS GIVEN IN WRITING BY NXP. | 14. TEARDROPS MAYBE ADDED AT THE FAB HOUSE TO ALL SIGNAL LAYERS. | 15. TWO SOLDER SAMPLES TO BE PROVIDED. | 16. SUPPLIER MARKINGS - ON SOLDER SIDE ONLY, WHERE SHOWN. | 17. THE PWB WILL BE MARKED AS LEAD FREE BY USE OF AN INK STAMP Pb | 18. THE PWB WILL BE MARKED AS LEAD FREE PROCESS COMPATIBLE BY USE OF AN INK STAMP 260 C | 20. FINISHED PCB MUST BE PANELIZED FOR ASSEMBLY ACCORDING TO CONTRACT MANUFACTURERS REQUIREMENTS. | 9. SOLDERMASK - TO MEET THE REQUIREMENTS OF IPC-SM-840E (OR LATEST REVISION). | 8. FAB VENDOR IS NOT ALLOWED TO USE ODB FOR FABRICATION. CAN BE USED ONLY FOR REFERENCE. | A. ALL VIAS USING X.1 DRILL SIZES ARE TO BE FILLED WITH NON-CONDUCTIVE VIA FILL. | B. OVERPLATE THE FILLED VIA AND APPLY FINISH METAL TREATMENT. | C. DIMPLE ON VIA-IN-PADS MUST BE NO GREATER THAN .003" AND PROTRUSION NO GREATER THAN .002" | THE ADDITION OF RAILS AND .125"NON-PLATED TOOLING HOLES ARE AT THE DISCRETION OF | CONTRACT MANUFACTURER.PANELIZATION MUST BE APPROVED BY CONTRACT MANUFACTURER. | KEEP A MINIMUM DISTANCE OF .100" FROM ANY BOARD FEATURES. | LACKWERKE-PETERS PP2795 OR EQUIVALENT AND MADE PLANAR TO THE PADS. | GREEN COLOR, BOTH SIDES. MODIFICATION OF SOLDERMASK IS NOT ALLOWED WITHOUT WRITTEN PERMISSION FROM NXP. | TYPE: LPI OR EQUIVALENT. | Tg - MUST BE GREATER THAN OR EQUAL TO 180 DEGREES CELSIUS. | Td - MUST BE GREATER THAN OR EQUAL TO 340 DEGREES CELSIUS. | - MUST BE UL RECOGNIZED AND MUST HAVE AN ID THAT CONFORMS TO UL94V-0 | B. DIAMETER OR SIZE = +/- .002 OF ORIGINAL DATA | A. LOCATION = +/-.002" OF PLATED PADS. | 22. | 19. A. ALL PLATED AND NON-PLATED THROUGH HOLES ARE TO BE DRILLED AT PRIMARY DRILL STEP, EXCEPT AS NOTED | IN NOTE 20B. THESE HOLE LOCATION TOLERANCES ARE TO BE +/-.002 IN REFERENCE TO THE PRIMARY DATUM. | 19 | 16 | DETAIL | IMPEDANCE REQUIREMENTS | IMPEDANCE TOLERANCE IS 10% | LAYER STACKUP | PRIMARY DATUM | GRID ORIGIN | B | A
PASTEMASK_TOP: 01 | PASTEMASK TOP
User.5: 12 | SECONDARY PASTEMASK
User.20: 1 | 2 | 49 | 50 | 04 | 13 | L10_SS | L1_PS
User.21: 1 | 5 | 20 | 6 | 10 | 16 | 15 | 11 | AK | A | E | 52 | C | 3 | 40 | 31 | 30 | 21 | P10 | P12 | P9 | 4 | P1 | P2 | P14 | 2 | P | 14 | 49 | 50 | 9 | 13 | 12 | CARD PUSH STROKE | CARD SET POSITION | CARD EJECT STROKE | 8 | 19 | 7 | C3 | CD | AA | 42 | 29 | 43 | 28 | 56 | 17 | 24 | 25 | 32 | 58 | 68 | 74 | 57 | 67 | 75 | PCB EDGE SIDE | PCB EDGE DIRECTION | BOARD EDGE NOT DEFINED | BY MANUFACTURER | ON | PUSH STROKE POSITION | CARD LOCK POSITION | CARD EJECT POSITION | +
User.22: 50 | 2 | 1 | 49
User.23: 9 | 13 | 1 | A | C | 5 | 3 | E | 16 | 28 | 43 | 74 | 75 | 21 | 20 | 11 | 10 | 2 | 12 | 14 | 8 | 4 | 7 | 39 | 40 | B12 | A1 | A12 | B1 | 24 | 6 | 25 | 36 | 48 | 37 | 50 | 49 | PCB EDGE SIDE | PCB EDGE | EDGE NOT DEFINED BY MANUFACTURER | PCB EDGE DIRECTION BOARD | L10_SS | 170-95869 REV A
User.25: OF 12
User.28: 22. THIS FAB_VIAFILL.ART SHOWS LOCATIONS OF VIA-IN-PAD TO BE FILLED. | 1/1 | 2 | 3
User.29: 24. | 1/1 | 3 | CAD DESIGNER: DELETE THIS FAB PAGE IF BACKDRILL IS NOT USED ON THIS DESIGN. | FAB SUPPLIER: DISREGARD THIS PAGE IF BACKDRILL REQUIRMENT IS NOT PROVIDED.
User.45: TOP TO LAYER X | BACK DRILL REFERENCE | BOTTOM TO LAYER X | LAYER X | MUST CUT LAYER | LAYER X+1 | MUST NOT CUT LAYER | LAYER X-1 | FIGURE | FINISHED_SIZE | 0.2032 | 0.2057 | 3.7084 | DRILL CHART: TOP to BOTTOM | ALL UNITS ARE IN MILLIMETERS | TOLERANCE_DRILL | +0.0/-0.2032 | +0.0/-0.2057 | +0.0762/-0.0762 | PLATED | QTY | 261 | 16 | 3 | 280 | TOTAL HOLES:
